# EAGLE board picrocope_hub_v2r1 (EAGLE 9.5.2)
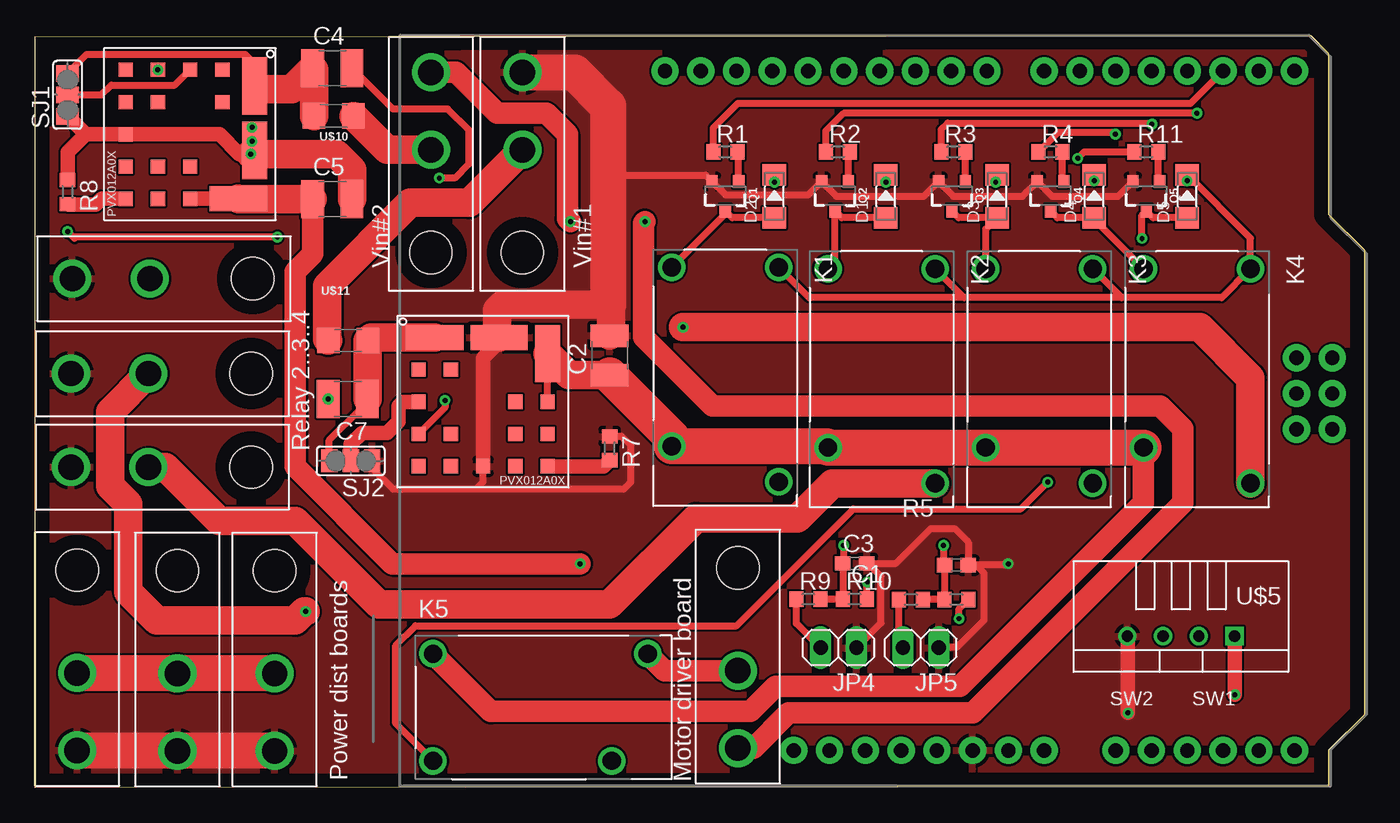
[diagram p0: board, top side]
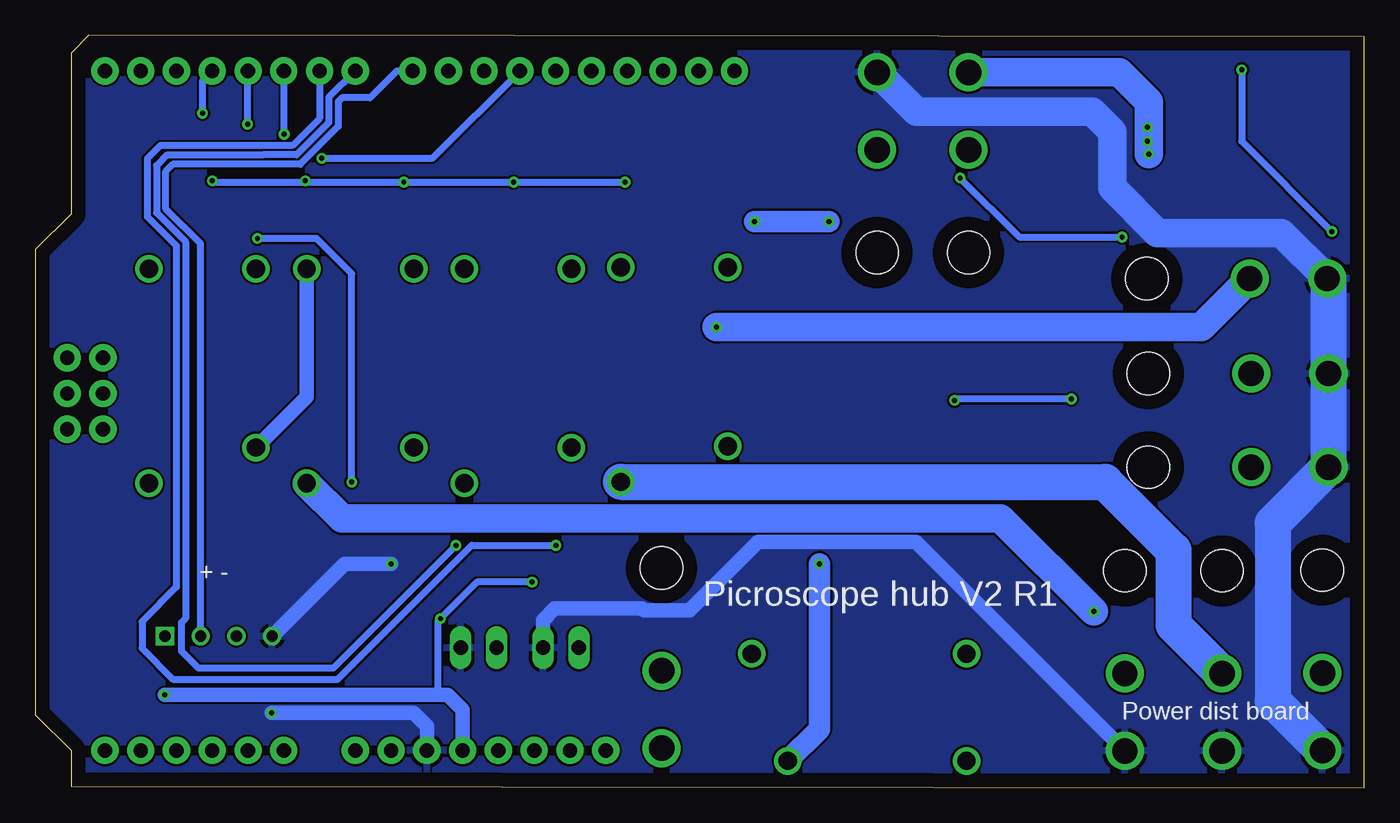
[diagram p1: board, bottom side, seen from below]

Size 94.38 x 53.44 mm. Coordinates in mm from the lower left corner, seen from the top.
Outline: 0,0 0,53.34 90.57,53.44 91.84,52.17 91.84,40.74 94.38,38.2 94.38,5.18 91.84,2.64 91.84,0.1 0,0
Copper layers (1*16): Top 0.035mm / dielectric 1.5mm / Bottom 0.035mm
Design rules "default *": minimum track width 20mil, minimum drill 0.35mm, track to track 6mil, track to pad 6mil, pad to pad 6mil, via to via 6mil, smd to smd 6mil, copper to edge 40mil, drill to drill 6mil, minimum pad ring 10mil, minimum via ring 8mil, stop-mask expansion 4mil, vias tented up to drill 0mil, thermal gap 10mil

## Footprints (pad centres in the part's own frame; a part is rotated, then mirrored left to right if it is on the bottom)
ARDUINO_R3 = drill 1.016 pad 1.93: 3.3V 2.54,-24.13; 5V 5.08,-24.13; A0 17.78,-24.13; A1 20.32,-24.13; A2 22.86,-24.13; A3 25.4,-24.13; A4 27.94,-24.13; A5 30.48,-24.13; AREF -9.144,24.13; D0 30.48,24.13; D1 27.94,24.13; D2 25.4,24.13; D3 22.86,24.13; D4 20.32,24.13; D5 17.78,24.13; D6 15.24,24.13; D7 12.7,24.13; D8 8.636,24.13; D9 6.096,24.13; D10 3.556,24.13; D11 1.016,24.13; D12 -1.524,24.13; D13 -4.064,24.13; GND@1 7.62,-24.13; GND@2 10.16,-24.13; GND@3 -6.604,24.13; GND@4 33.16,-1.32; IOREF -2.54,-24.13; MISO 30.62,3.76; MOSI 33.16,1.22; NC -5.08,-24.13; RESET@1 0,-24.13; RESET@2 30.62,-1.32; SCK 30.62,1.22; SCL -14.224,24.13; SDA -11.684,24.13; VCC 33.16,3.76; VIN 12.7,-24.13
C0603 = smd 1.1 x 1: 1 -0.85,0; 2 0.85,0
C1210 = smd 1.6 x 2.7: 1 -1.4,0; 2 1.4,0
LL-34 = smd 1.524 x 1.676: A -1.524,0; C 1.524,0
1X02 = drill 1.016 long: 1 -1.27,0; 2 1.27,0
RELAY_2071508-1 = drill 1.3: 1 -7.85,3.8; 2 -7.85,-3.8; 3 7.39,3.8; 4 4.85,-3.8
SOT23-3 = smd 0.8 x 0.9: 1 -0.95,-1; 2 0.95,-1; 3 0,1.1
R0603 = smd 1 x 1.1: 1 -0.85,0; 2 0.85,0
SJ_2 = smd 1.168 x 1.6: 1 -1.524,0; 2 0,0; 3 1.524,0
PVX012A0X = smd 1.01 x 1.01: 8 3.81,1.52; 9 1.52,1.52; 11 3.81,3.81; 12 8.39,3.81; 13 8.39,6.1; 14 10.68,3.81; 15 8.39,1.52; 16 1.52,8.39; 17 3.81,8.39; GND 6.1,1.52; ON_OFF 1.52,6.1; PGOOD 1.52,3.81; SENSE 10.68,6.1; TRIM 10.68,1.52 | smd 4.07 x 1.77: GRN 7.24,10.67; VIN 2.67,10.67 | smd 1.77 x 4.07: VOUT 10.67,9.53
MINI-FIT_JR_CONN = drill 1.8: P$1 0,0; P$2 0,5.5 | hole 3: 0,-7.3
TEMP-HUM-SENSOR-DHT22 = drill 0.8 square: 1 -3.81,0 | drill 0.8: 2 -1.27,0; 3 1.27,0; 4 3.81,0
1206 = smd 1.6 x 1.8: 1 -1.4,0; 2 1.4,0

## Placement (x,y rotation side)
B1  ARDUINO_UNO_R3  [ARDUINO_R3]  58.95,26.77 0 top
C1  0.1uF  [C0603]  65.42,15.8 0 top
C2  47 uF  [C1210]  40.8,30.7 90 top
C3  0.1uF  [C0603]  58.2,15.93 0 top
C4  47 uF  [C1210]  21.1,51.1 0 top
C5  47 uF  [C1210]  21.1,41.8 0 top
C7  47 uF  [C1210]  22.2,27.6 180 top
D1  1N4148  [LL-34]  60.4,42 90 top
D2  1N4148  [LL-34]  52.49,42 90 top
D3  1N4148  [LL-34]  68.3,42 90 top
D4  1N4148  [LL-34]  75.2,42 90 top
D5  1N4148  [LL-34]  81.8,42 90 top
JP4  [1X02]  57.04,9.94 180 top
JP5  [1X02]  62.89,9.94 180 top
K1  2071508-1  [RELAY_2071508-1]  49,29.1 270 top
K2  2071508-1  [RELAY_2071508-1]  60.1,29 270 top
K3  2071508-1  [RELAY_2071508-1]  71.3,29 270 top
K4  2071508-1  [RELAY_2071508-1]  82.5,29 270 top
K5  2071508-1  [RELAY_2071508-1]  36.1,5.7 0 top
Q1  600mA/40V  [SOT23-3]  49.01,42.05 180 top
Q2  600mA/40V  [SOT23-3]  56.8,42.05 180 top
Q3  600mA/40V  [SOT23-3]  65.1,42.05 180 top
Q4  600mA/40V  [SOT23-3]  72.1,42.05 180 top
Q5  600mA/40V  [SOT23-3]  78.9,42.05 180 top
R1  1k  [R0603]  49.01,45.15 0 top
R2  1k  [R0603]  57,45.15 0 top
R3  1k  [R0603]  65.2,45.15 0 top
R4  1k  [R0603]  72.1,45.15 0 top
R5  1k  [R0603]  62.19,13.36 0 top
R6  10k  [R0603]  65.42,13.36 0 top
R7  2.727k  [R0603]  40.8,24.1 270 top
R8  2.727k  [R0603]  2.3,42.3 270 top
R9  1k  [R0603]  54.9,13.39 0 top
R10  10k  [R0603]  58.2,13.39 0 top
R11  1k  [R0603]  78.9,45.15 0 top
SJ1  [SJ_2]  2.3,49.2 90 top
SJ2  [SJ_2]  22.4,23.2 180 top
U$1  PVX012A0XV1  [PVX012A0X]  25.7,21.3 0 top
U$2  PVX012A0XV1  [PVX012A0X]  4.9,52.5 270 top
U$3  MOLEX_0039301022  [MINI-FIT_JR_CONN]  34.6,45.3 0 top
U$4  MOLEX_0039301022  [MINI-FIT_JR_CONN]  28.1,45.3 0 top
U$5  TEMP-HUM-SENSOR-DHT22  [TEMP-HUM-SENSOR-DHT22]  81.36,10.75 180 top
U$6  MOLEX_0039301022  [MINI-FIT_JR_CONN]  2.98,8.14 180 top
U$7  MOLEX_0039301022  [MINI-FIT_JR_CONN]  8.04,22.76 90 top
U$8  MOLEX_0039301022  [MINI-FIT_JR_CONN]  8.04,29.41 90 top
U$9  MOLEX_0039301022  [MINI-FIT_JR_CONN]  8.14,36.15 90 top
U$10  PTC_1206  [1206]  21.2,47.7 180 top
U$11  PTC_1206  [1206]  22.22,31.75 0 top
U$12  MOLEX_0039301022  [MINI-FIT_JR_CONN]  17,8.1 180 top
U$13  MOLEX_0039301022  [MINI-FIT_JR_CONN]  10.1,8.1 180 top
U$14  MOLEX_0039301022  [MINI-FIT_JR_CONN]  49.9,8.3 180 top

## Library data of the parts
B1 = SparkFun-Boards
C1-C5 C7 R7 R8 = adafruit
D1-D5 = Seeed-Diode; MPN: 1N4148
JP4 JP5 = pinhead
K1-K5 = 2071508-1; MANUFACTURER: TE Connectivity; MAXIMUM_PACKAGE_HEIGHT: 15.7mm; PARTREV: 0919; STANDARD: Manufacturer Recommendations
Q1-Q5 = SparkFun-DiscreteSemi; PROD_ID: TRANS-08049
R1-R6 R9-R11 = resistor
SJ1 SJ2 = jumper
U$1 U$2 = PVX012A0X
U$3 U$4 U$6-U$14 = pat
U$5 = diy-modules

## Nets
5V: B1.5V R6.2 R10.2 U$5.1
DHT_DAT: B1.D8 U$5.2
GND: B1.GND@1 C1.2 C2.2 C3.2 JP4.1 JP5.1 Q1.2 Q2.2 Q3.2 Q4.2 Q5.2 R7.1 SJ2.1 U$1.GND U$1.GRN U$3.P$2 U$5.4 U$6.P$2 U$7.P$2 U$8.P$2 U$9.P$2 U$12.P$2 U$13.P$2
GND2: C5.2 R8.1 SJ1.1 U$2.GND U$2.GRN U$4.P$2 U$14.P$2
N$1: Q1.1 R1.2
N$2: D2.A K1.2 Q1.3
N$3: U$4.P$1 U$10.1
N$4: JP5.2 R5.1
N$5: Q2.1 R2.2
N$6: D1.A K2.2 Q2.3
N$7: Q3.1 R3.2
N$8: D3.A K3.2 Q3.3
N$9: Q4.1 R4.2
N$10: D4.A K4.2 Q4.3
N$12: JP4.2 R9.1
N$14: Q5.1 R11.2
N$15: C4.2 U$2.PGOOD
N$16: C7.2 U$1.PGOOD
N$17: D5.A K5.2 Q5.3
N$19: R8.2 U$2.TRIM
N$20: R7.2 U$1.TRIM
N$21: SJ1.2 U$2.ON_OFF
N$22: SJ2.2 U$1.ON_OFF
N$23: U$3.P$1 U$11.1
O2: K2.3 U$7.P$1
O3: K3.3 U$8.P$1
O4: K4.3 U$9.P$1
O_MOTOR: K5.3 U$14.P$1
O_POWER_DIST: K1.3 U$6.P$1 U$12.P$1 U$13.P$1
P1: B1.D2 R1.1
P2: B1.D3 R2.1
P3: B1.D4 R3.1
P4: B1.D5 R4.1
P5: B1.D11 R11.1
SW1: B1.D6 C3.1 R9.2 R10.1
SW2: B1.D7 C1.1 R5.2 R6.1
VIN_1: C7.1 SJ2.3 U$1.VIN U$11.2
VIN_2: C4.1 SJ1.3 U$2.VIN U$10.2
VO_1: C2.1 D1.C D2.C D3.C D4.C D5.C K1.1 K1.4 K2.1 K2.4 K3.1 K3.4 K4.1 K4.4 K5.1 U$1.SENSE U$1.VOUT
VO_2: C5.1 K5.4 U$2.SENSE U$2.VOUT

## Tracks (layer width: path | path; a pad name or v marks a point on that pad's centre or on a via)
5V  (via drill 0.35)
  Top 0.508: R10.2 59.05,14.55 v59.1,14.6 | v65.6,12 65.6,12.69 R6.2
  Top 1.016: v85.2,6.6 85.2,10.72 U$5.1
  Bottom 0.508: v59.1,14.6 63,14.6 v65.6,12 65.8,11.8 65.8,6.6
  Bottom 1.016: B1.5V 64.03,5.53 65.1,6.6 65.8,6.6 v85.2,6.6
DHT_DAT
  Bottom 0.508: U$5.2 82.63,38.63 85.1,41.1 85.1,43.78 84.6,44.28 75.55,44.28 72.87,46.97 72.87,48.73 72.6,49 70.6,49 68.7,50.9 B1.D8
GND  (via drill 0.35)
  Top 0.508: 40.69,43.5 47.6,43.5 Q1.2 49,42.1 54.91,42.1 Q2.2 56.9,42 63.1,42 Q3.2 65.2,42 70.1,42 Q4.2 72.2,42 76.91,42 Q5.2 | JP4.1 60.06,11.68 60.06,15 59.14,15.93 C3.2 61.13,15.93 63.6,18.4 65.3,18.4 66.27,17.44 C1.2 | JP5.1 64.22,10 65.5,10 67.4,11.9 67.4,15.2 66.8,15.8 C1.2 | v69.1,15.9 69,15.8 C1.2 | SJ2.1 23.92,22.68 25.4,21.2 31.3,21.2 | U$1.GND 31.8,21.7 31.3,21.2 | 31.3,21.2 41.8,21.2 42.3,21.7 42.3,24.3 41.65,24.95 R7.1
  Top 1.016: U$1.GND 31.8,30.5 32.94,31.64 U$1.GRN | v77.6,5.3 77.6,10.7 U$5.4
  Top 2.032: U$1.GRN 32.8,32.11 32.8,33.9 33.2,34.3 40.69,34.3 40.89,34.3 40.89,32.19 C2.2
  Top 2.54: U$6.P$2 10.06,2.64 U$13.P$2 U$12.P$2 | 40.69,34.3 40.69,43.5 40.69,48.41 38.3,50.8 U$3.P$2
  Bottom 1.016: B1.GND@1 66.57,4.37 67.5,5.3 v77.6,5.3 | U$5.4 72.4,15.9 v69.1,15.9 | U$12.P$2 31.86,17.46 43.04,17.46 47.92,12.58 51.15,12.58 51.29,12.71 57.49,12.71 58.31,11.89 JP4.1
  Bottom 2.032: U$3.P$2 31.8,48 19.3,48 17.9,46.6 17.9,42.6 14.7,39.4 5.89,39.4 U$9.P$2
  Bottom 2.54: U$9.P$2 2.54,36.05 U$8.P$2 U$7.P$2 6.51,18.79 6.51,6.17 U$6.P$2
  pour Top: -2.18,55.98 -2.18,-4.98 96.92,-4.98 96.92,55.98
  pour Bottom: -2.18,55.98 -2.18,-4.98 96.92,-4.98 96.92,55.98
GND2  (via drill 0.35)
  Top 1.016: U$2.GRN v15.31,45 14.5,45 13.1,46.4 U$2.GND 3.58,46.4 | SJ1.1 3.58,46.4 | R8.1 2.3,45.12 3.58,46.4
  Top 1.524: U$4.P$2 29.9,50.8 32.8,47.9 36.3,47.9 37.8,46.4 37.8,40.4 v38,40.2 | v43.3,40.2 43.2,40.1 43.2,32 48.1,27.1 79.9,27.1 81.5,25.5 81.5,20.2 66.6,5.3 53.5,5.3 51,2.8 U$14.P$2
  Top 2.032: C5.2 22.5,43.9 21.4,45 v15.31,45
  Bottom 1.524: v38,40.2 v43.3,40.2
  Bottom 2.032: U$4.P$2 17.4,50.8 15.31,48.71 v15.31,45
N$1
  Top 0.508: Q1.1 49.96,45.05 R1.2
N$2
  Top 0.508: D2.A 49.48,40.47 Q1.3 49.01,40.76 K1.2
N$3
  Top 2.032: U$4.P$1 25,45.3 U$10.1
N$4
  Top 0.508: JP5.2 61.34,10.22 R5.1
N$5
  Top 0.508: Q2.1 57.75,45.05 R2.2
N$6
  Top 0.508: D1.A 57.27,40.47 Q2.3 56.8,37.35 K2.2
N$7
  Top 0.508: Q3.1 R3.2
N$8
  Top 0.508: Q3.3 65.57,40.47 D3.A 67.5,39.67 K3.2
N$9
  Top 0.508: Q4.1 72.95,43.15 R4.2
N$10
  Top 0.508: Q4.3 72.57,40.47 D4.A 75.2,40.35 K4.2
N$11  (via drill 0.35)
  other vias: 15.4,45.9
N$12
  Top 0.508: JP4.2 54.05,11.66 R9.1
N$13  (via drill 0.35)
  other vias: 15.4,46.9
N$14
  Top 0.508: Q5.1 79.75,43.15 R11.2
N$15  (via drill 0.35)
  Top 0.508: v2.3,39.5 2.75,39.05 | 2.75,39.05 2.8,39 | v28.7,43.3 29.8,43.3 30.8,44.3 30.8,46.7 29.3,48.2 25.4,48.2 C4.2 | v17.2,39.1 2.8,39.1 2.75,39.05
  Bottom 0.508: U$2.PGOOD 8.71,45.91 v2.3,39.5 | v28.7,43.3 24.5,39.1 v17.2,39.1
  other vias: 8.71,50.98
N$16  (via drill 0.35)
  Top 0.508: v29.1,27.5 29.1,26.99 U$1.PGOOD
  Bottom 0.508: C7.2 29,27.6 v29.1,27.5
  other vias: 20.8,27.6
N$17  (via drill 0.35)
  Top 0.508: D5.A 79.37,40.47 Q5.3 78.6,40.65 v78.6,39 | K5.2 25.6,4.55 25.6,10.1 27,11.5 49.8,11.5 58.1,19.8 70,19.8 v71.9,21.7
  Bottom 0.508: v71.9,21.7 71.9,36.5 74.4,39 v78.6,39
N$19
  Top 1.016: U$2.TRIM 4.72,41.82 4.3,41.4 2.35,41.4 R8.2
N$20
  Top 1.016: U$1.TRIM 40.37,22.82 R7.2
N$21
  Top 0.508: SJ1.2 4.7,49.2 5.4,49.9 9.92,49.9 U$2.ON_OFF
N$22
  Top 1.016: SJ2.2 22.4,24.4 23.2,25.2 25,25.2 25.8,26 25.8,27.1 26.1,27.4 U$1.ON_OFF
N$23
  Top 2.032: U$3.P$1 30.83,41.53 26.64,41.53 20.72,35.61 20.72,31.85 U$11.1
O2
  Top 2.032: K2.3 56.6,21.61 54.12,19.13 46.93,19.13 40.8,13 24.39,13 18.46,18.93 13.07,18.93 9.24,22.76 U$7.P$1
O3  (via drill 0.35)
  Top 2.032: v19.2,12.5 19.09,12.5 18.46,11.87 8.64,11.87 6.61,13.89 6.61,20.13 5.32,21.42 5.32,26.69 U$8.P$1
  Bottom 2.032: K3.3 72.59,19.1 51.39,19.1 51.36,19.13 25.83,19.13 v19.2,12.5
O4  (via drill 0.35)
  Top 2.032: K4.3 86.3,29.1 82.7,32.7 v46,32.7
  Bottom 2.032: U$9.P$1 11.59,32.7 v46,32.7
O_MOTOR
  Top 1.524: U$14.P$1 44.69,8.3 K5.3
O_POWER_DIST
  Top 2.54: 10.04,8.04 U$13.P$1 | U$12.P$1 U$13.P$1 | U$6.P$1 3.02,8.1 U$13.P$1
  Bottom 2.54: K1.3 18.41,21.71 13.55,16.85 13.55,11.55 U$13.P$1
P1
  Top 0.508: R1.1 48.16,46.86 49.9,48.6 82.05,48.6 B1.D2
P2  (via drill 0.35)
  Top 0.508: R2.1 56.15,46.65 57.4,47.9 v82.5,47.9
  Bottom 0.508: v82.5,47.9 82.5,50.21 B1.D3
P3  (via drill 0.35)
  Top 0.508: R3.1 64.35,46.75 64.8,47.2 79.22,47.2 v79.3,47.12
  Bottom 0.508: v79.3,47.12 79.3,50.87 B1.D4
P4  (via drill 0.35)
  Top 0.508: v76.7,46.41 76.61,46.51 72.61,46.51 R4.1
  Bottom 0.508: v76.7,46.41 76.7,50.87 B1.D5
P5  (via drill 0.35)
  Top 0.508: R11.1 74.48,45.15 v74.03,44.7
  Bottom 0.508: v74.03,44.7 66.17,44.7 B1.D11
SW1  (via drill 0.35)
  Top 0.508: v57.4,17.2 57.4,15.97 C3.1 R10.1 R9.2
  Bottom 0.508: B1.D6 74.19,47.51 76.1,45.6 78.2,45.6 85.5,45.6 86.42,44.68 86.42,40.55 84.36,38.49 84.36,14.24 86.8,11.8 86.8,9.9 84.6,7.7 72.9,7.7 64.19,16.42 64.17,16.42 63.39,17.2 v57.4,17.2
SW2  (via drill 0.35)
  Top 0.508: v64.5,17.2 64.5,15.86 C1.1 R6.1 R5.2
  Bottom 0.508: B1.D7 73.53,49.02 73.53,47.24 75.83,44.94 78.2,44.94 85,44.94 85.76,44.18 85.76,40.83 83.7,38.77 83.7,12 84,11.7 84,9.7 82.8,8.5 73.2,8.5 v64.5,17.2
VIN_1
  Top 0.508: SJ2.3 20.88,24.68 23.1,26.9 23.7,26.9 23.9,27.1 23.9,27.3 C7.1
  Top 2.032: U$1.VIN 23.84,31.97 U$11.2 23.6,31.73 C7.1
VIN_2
  Top 0.508: SJ1.3 3.65,52.07 5.9,52.08 14.92,52.08 15.57,51.43 U$2.VIN 15.8,49.6 16.1,49.6
  Top 2.032: U$10.2 19.8,51 C4.1 18.2,49.6 16.1,49.6
VO_1  (via drill 0.35)
  Top 0.508: U$1.SENSE U$1.VOUT | D2.C v52.49,43.01 v52.5,43 | v81.8,43.1 D5.C 86.3,39.02 K4.1 84.25,34.8 77.15,34.8 | D4.C v75.2,43.1 | D3.C 68.2,43.42 v68.2,43 | D1.C v60.4,43 | K3.1 77.15,34.8 | 77.15,34.8 65.95,34.8 | 65.95,34.8 K2.1 | 65.95,34.8 54.95,34.8 K1.1
  Top 1.524: K4.4 78.7,20.2 65.68,7.18 52.58,7.18 50.8,5.4 32.35,5.4 K5.1
  Top 2.032: C2.1 37.9,29.3 U$1.VOUT | 56.2,24.25 K2.4 | 45.2,24.9 K1.4
  Top 2.54: K1.4 56.2,24.25 | K2.4 K3.4 K4.4 | C2.1 45.2,24.9
  Bottom 0.508: v52.5,43 v60.4,43 v68.2,43 75.1,43 v75.2,43.1 75.3,43 81.7,43 v81.8,43.1
  Bottom 1.016: K3.1 75.1,27.75 K4.4
VO_2  (via drill 0.35)
  Top 1.016: U$2.SENSE U$2.VOUT
  Top 1.524: C5.1 19.7,37.9 18.46,36.66 18.46,22.79 25.36,15.9 v38.7,15.9
  Top 2.032: C5.1 14.46,41.8 U$2.VOUT
  Bottom 1.524: v38.7,15.9 38.7,4.15 K5.4

## Text on the board
tPlace: Vin#2 | Vin#1 | Relay 2..3..4 | SW2 | SW1 | Power dist boards | Motor driver board
bPlace: Picroscope hub V2 R1 | - + | - + | Power dist board